# Altium PCB SolarChargerV2.PcbDoc
Units mm, origin at the board's own origin, x right, y up, seen from the top; angles counter-clockwise.
Board outline 61 x 50 mm, 2 copper layers (Top Layer, Bottom Layer); 114 components, 46 nets, 315 pads, 1851 vias.
Unrouted connection lines stored in the file: 111.
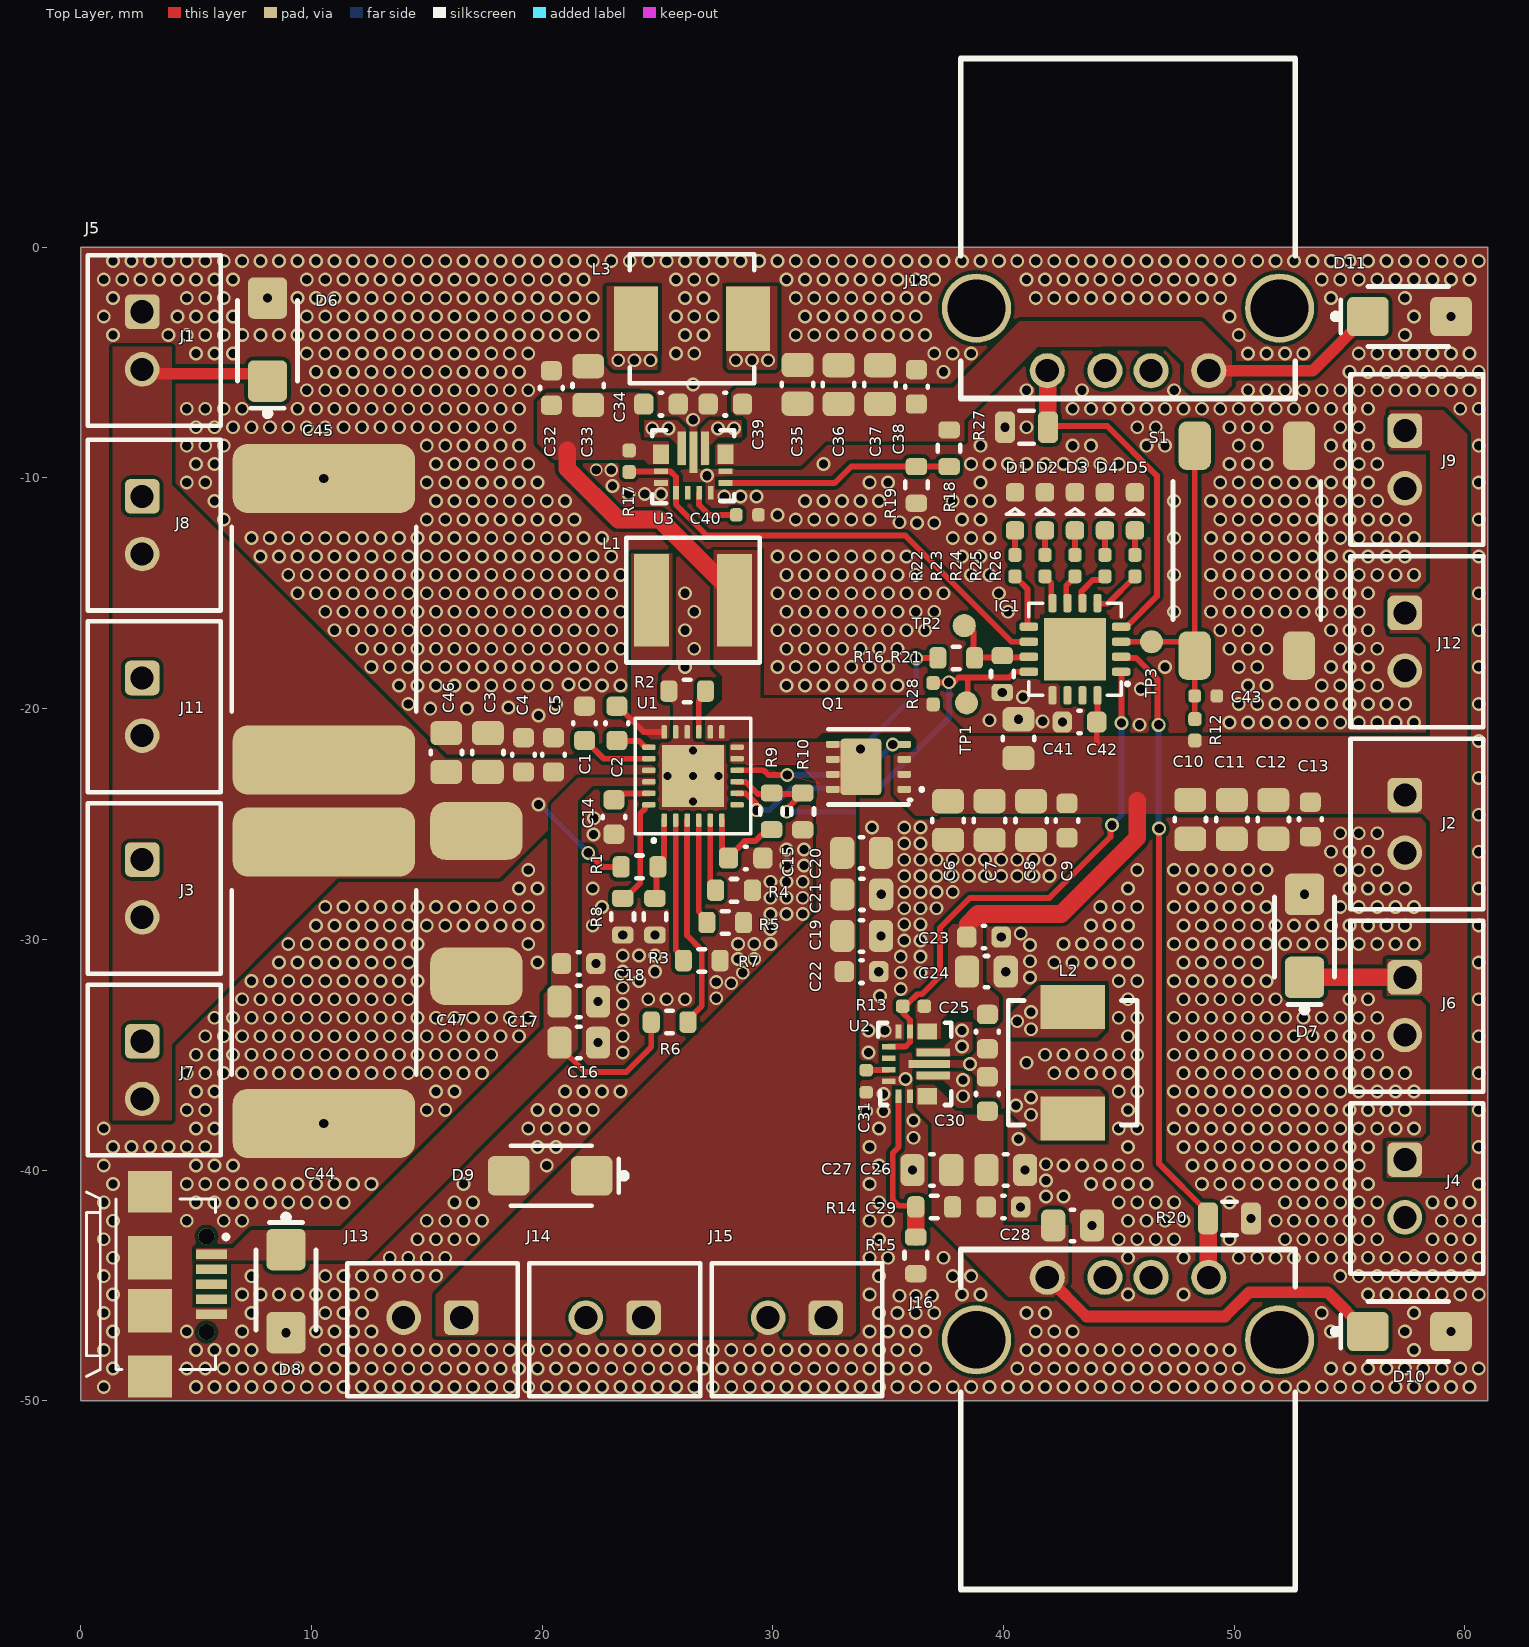
[diagram p0: Top Layer view]
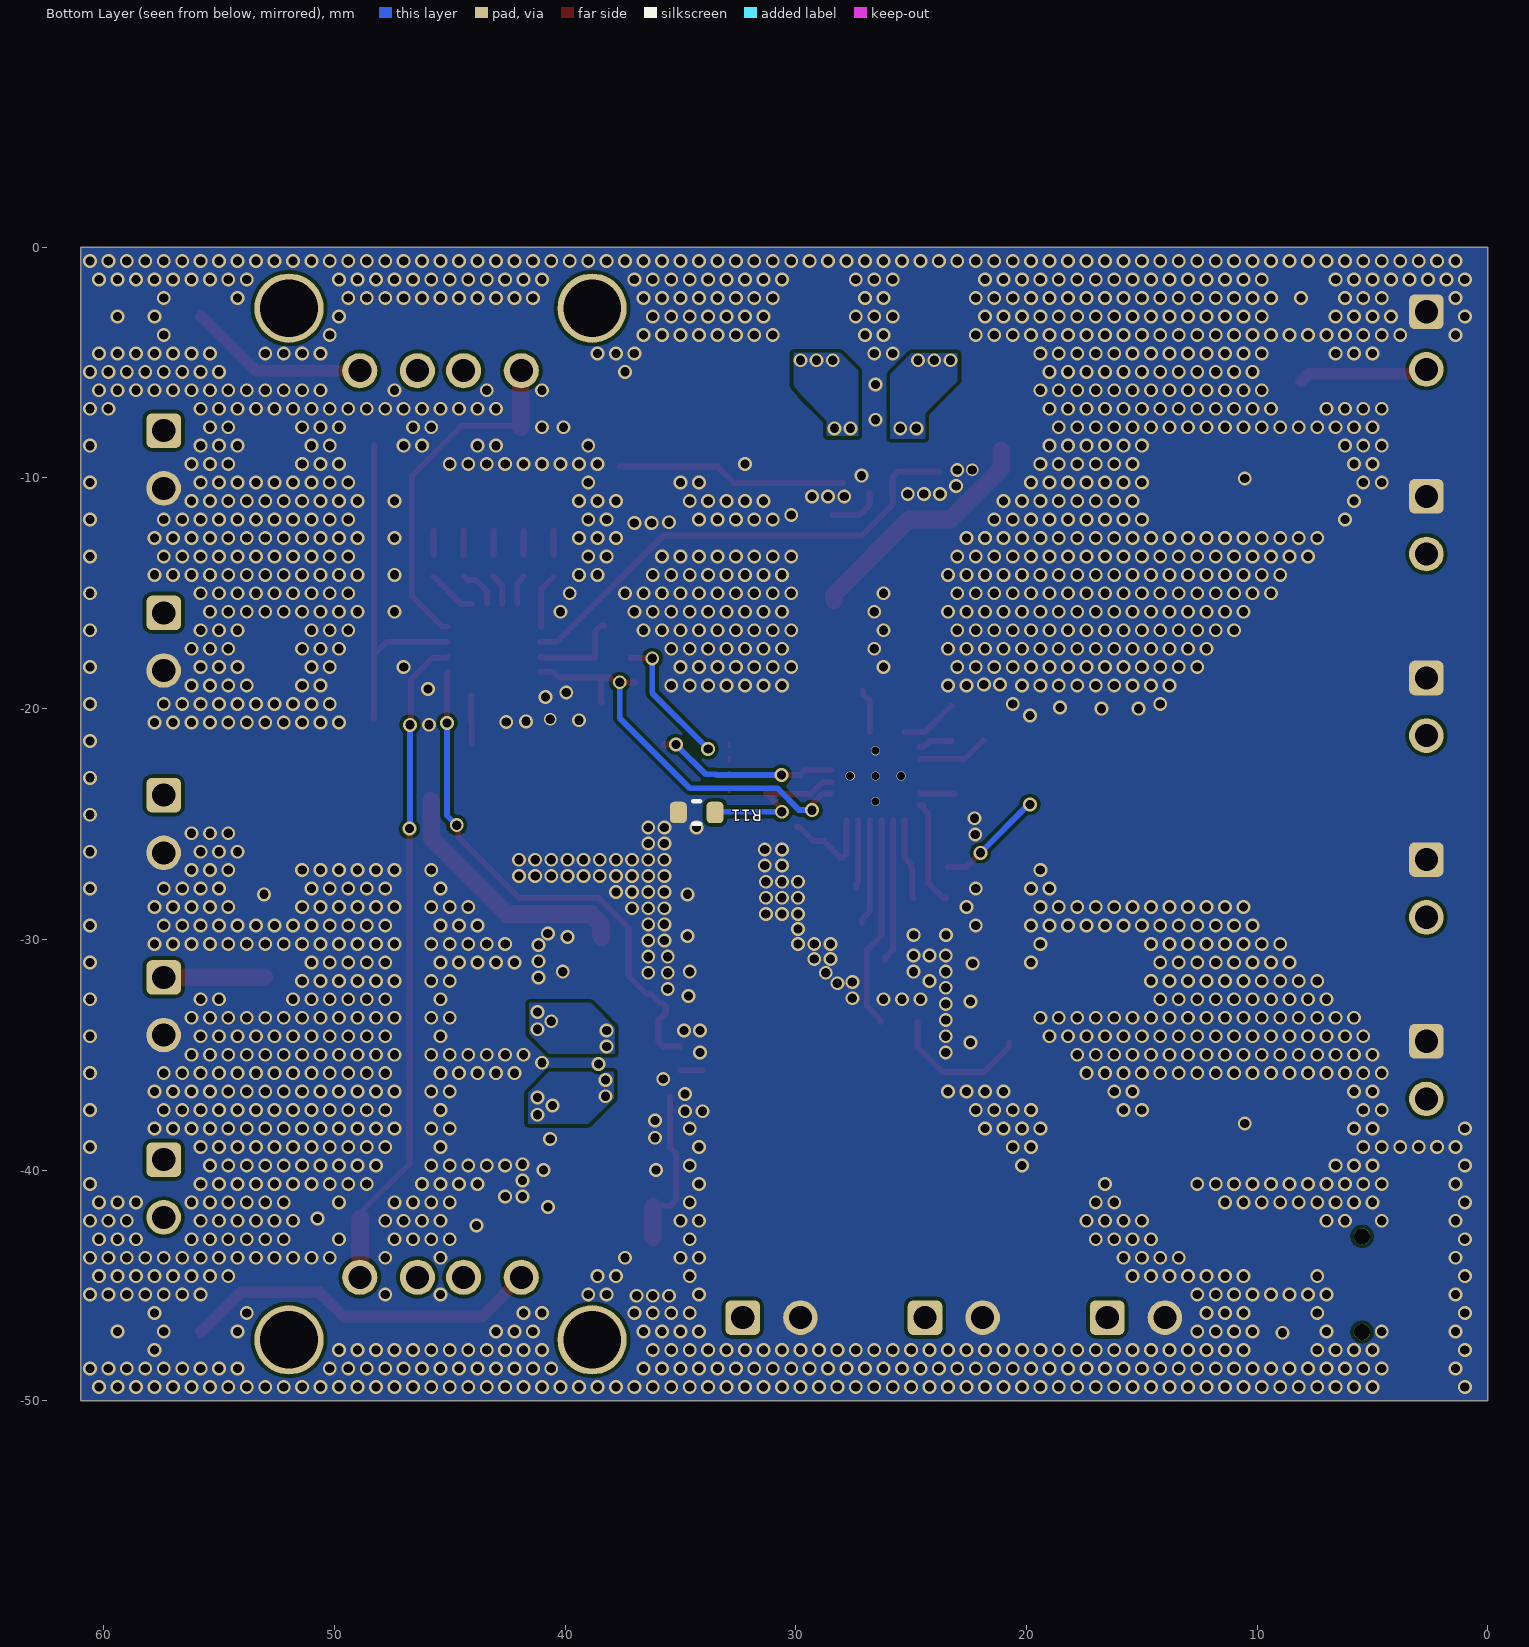
[diagram p1: Bottom Layer view, seen from below]
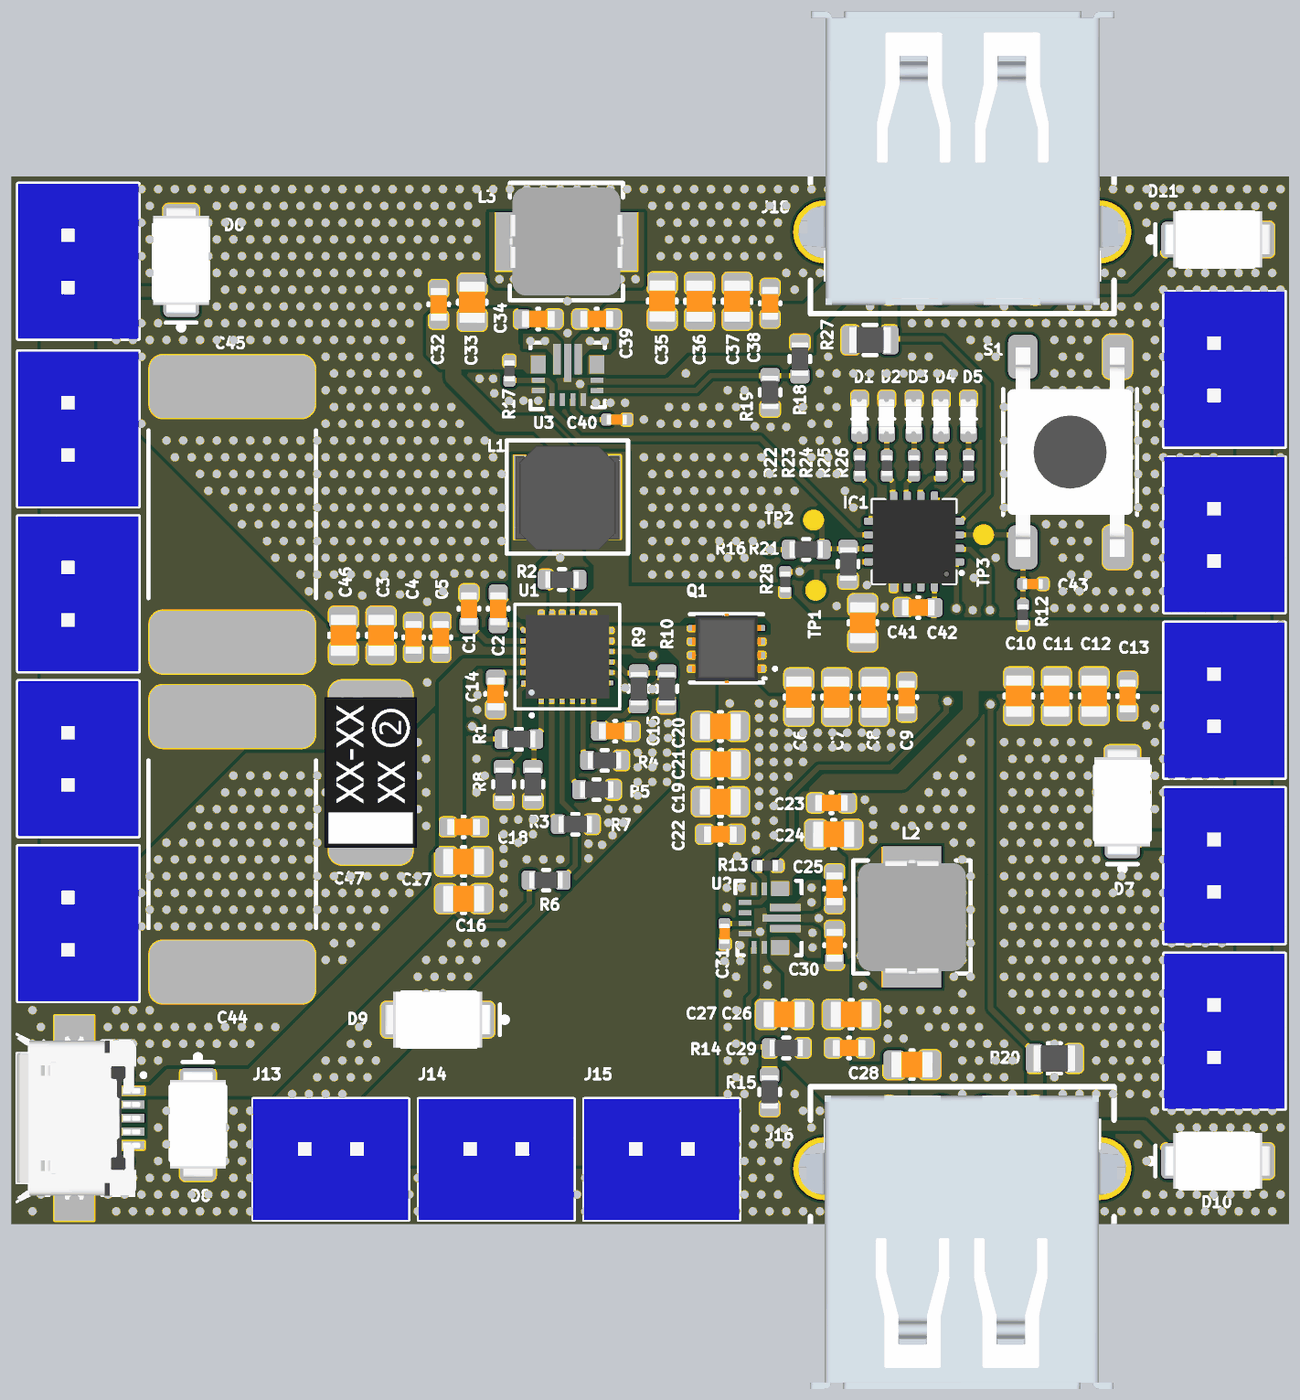
[diagram p2: 3D render of the assembled board from above, using the file's embedded part models]

## Layer stack, top to bottom
Top Solder: solder mask 0.0102, Solder Resist, Dk 3.5
Top Layer: signal copper 0.0356
Dielectric 1: dielectric 0.32, FR-4, Dk 4.8
Bottom Layer: signal copper 0.0356
Bottom Solder: solder mask 0.0102, Solder Resist, Dk 3.5

## Board outline
0,-50 0,0 61,0 61,-50

## Design rules (kind name [scope] priority, off if disabled: settings)
Clearance [All] p1: gap=0.15 ignorepadtopadclearanceinfootprint=FALSE except(0: Arc-Hole Track-Hole SMDPad-Hole THPad-Hole Via-Hole Fill-Hole Poly-Hole Region-Hole Text-Hole; 0.102: Arc-Arc Arc-Track Arc-SMDPad Track-Track Track-SMDPad SMDPad-SMDPad)
HoleSize [All] p1: absolutevalues=TRUE maxlimit=2.54 minlimit=0.3 maxpercent=80.000 minpercent=20.000
HoleToHoleClearance [All] p1: gap=0.127 allowstackedmicrovias=TRUE
MinimumSolderMaskSliver [All] p1: minsoldermaskwidth=0.127
PlaneConnect [All] p1: planeconnectstyle=Direct reliefexpansion=0.508 reliefentries=4 reliefconductorwidth=0.254 reliefairgap=0.254
PolygonConnect [All] p1: connectstyle=Direct reliefconductorwidth=0.254 reliefentries=4 polygonreliefangle="90 Angle" airgapwidth=0.254
RoutingVias [All] p1: holewidth=0.4 width=0.6 viastyle="Through Hole" minholewidth=0.3 minwidth=0.55 maxholewidth=1 maxwidth=0.1
SilkToSilkClearance [All] p1: silktosilkclearance=0.152
SilkToSolderMaskClearance [IsPad] p1: minsilkscreentomaskgap=0.152 clearancetoexposedcopper=TRUE
SolderMaskExpansion [All] p1: expansion=0.06 istentingtop=FALSE
Width [All] p1: maxlimit=0.762 minlimit=0.254 preferedwidth=0.254 minimp=50.000000 maximp=50.000000 favimp=50.000000
24 further rules are at their usual default settings.

## Components (designator, comment, footprint, x,y, rotation, side; value= is the part's Value field where it differs from the comment)
C1 "4.7u" C0603_N 21.844,-20.634 r270 top
C2 "10n" C0603_N 23.241,-20.634 r90 top
C3 "10u" C0805_N 17.65,-21.9 r90 top
C4 "100n" C0603_N 19.2,-22 r90 top
C5 "100n" C0603_N 20.5,-22 r90 top
C6 "10u" C0805_N 37.6,-24.85 r270 top
C7 "10u" C0805_N 39.4,-24.85 r270 top
C8 "10u" C0805_N 41.2,-24.85 r270 top
C9 "100n" C0603_N 42.75,-24.85 r270 top
C10 "10u" C0805_N 48.1,-24.8 r270 top
C11 "10u" C0805_N 49.9,-24.8 r270 top
C12 "10u" C0805_N 51.7,-24.8 r270 top
C13 "100n" C0603_N 53.3,-24.8 r270 top
C14 "4.7u" C0603_N 23.114,-24.698 r90 top
C15 "4.7u" C0603_N 28.829,-26.476 r0 top
C16 "10u" C0805_N 21.59,-34.477 r0 top
C17 "10u" C0805_N 21.59,-32.699 r0 top
C18 "100n" C0603_N 21.59,-31.048 r0 top
C19 "10u" C0805_N 33.85,-29.85 r0 top
C20 "10u" C0805_N 33.85,-26.25 r0 top
C21 "10u" C0805_N 33.86,-28.05 r0 top
C22 "100n" C0603_N 33.85,-31.4 r0 top
C23 "10u" C0603_N 39.155,-29.9 r0 top
C24 "10u" C0805_N 39.26,-31.4 r0 top
C25 "100n" C0603_N 39.3,-34 r270 top
C26 "22u" C0805_N 40.1,-40 r0 top
C27 "22u" C0805_N 36.9,-40 r180 top
C28 "22u" C0805_N 43,-42.4 r0 top
C29 "1u" C0603_N 40,-41.6 r0 top
C30 "100n" C0603_N 39.3,-36.7 r90 top
C31 "100n" C0402_N 34.05,-36.15 r270 top
C32 "10u" C0603_N 20.4,-6.1 r90 top
C33 "10u" C0805_N 22,-6 r90 top
C34 "100n" C0603_N 25.155,-6.8 r0 top
C35 "22u" C0805_N 31.075,-5.94 r90 top
C36 "22u" C0805_N 32.85,-5.95 r90 top
C37 "22u" C0805_N 34.65,-5.95 r90 top
C38 "1u" C0603_N 36.225,-6.05 r90 top
C39 "100n" C0603_N 27.945,-6.8 r180 top
C40 "100n" C0402_N 28.9,-11.6 r0 top
C41 "10u" C0805_N 40.65,-21.3 r90 top
C42 "100n" C0603_N 43.3,-20.575 r180 top
C43 "CAP" C0402_N 48.77,-19.45 r0 top
C44 "2,2m" C592D_X 10.541,-31.877 r90 top
C45 "2,2m" C592D_X 10.541,-16.125 r270 top
C46 "10u" C0805_N 15.85,-21.9 r90 top
C47 "100u" C_TR3D 17.15,-28.45 r90 top
D1 "LED" LED_0603 40.5,-11.45 r90 top
D2 "LED" LED_0603 41.8,-11.45 r90 top
D3 "LED" LED_0603 43.1,-11.45 r90 top
D4 "LED" LED_0603 44.4,-11.45 r90 top
D5 "LED" LED_0603 45.7,-11.45 r90 top
D6 "SMAJ15A" DO-214AC 8.1,-4 r90 top
D7 "SMAJ15A" DO-214AC 53.05,-29.85 r90 top
D8 "SMAJ15A" DO-214AC 8.9,-45.25 r270 top
D9 "SMAJ15A" DO-214AC 20.35,-40.25 r180 top
D10 "SMAJ15A" DO-214AC 57.6,-47 r0 top
D11 "SMAJ15A" DO-214AC 57.6,-3 r0 top
IC1 "PIC16F18425" UQFN-16 43.1,-17.425 r180 top
J1 "" B2B-XH-A 2.667,-10.795 r270 top
J2 "" B2B-XH-A 57.4,-23.75 r270 top locked
J3 "" B2B-XH-A 2.667,-34.417 r270 top
J4 "" B2B-XH-A 57.4,-39.55 r270 top locked
J5 "" B2B-XH-A 2.667,-2.794 r270 top
J6 "" B2B-XH-A 57.4,-31.65 r270 top locked
J7 "USB_OTG" WR-COM-629105136821 3,-46.1 r270 top
J8 "" B2B-XH-A 2.667,-18.669 r270 top
J9 "" B2B-XH-A 57.4,-7.95 r270 top locked
J11 "" B2B-XH-A 2.667,-26.543 r270 top
J12 "" B2B-XH-A 57.4,-15.85 r270 top locked
J13 "" B2B-XH-A 16.5,-46.4 r180 top
J14 "" B2B-XH-A 24.4,-46.4 r180 top
J15 "" B2B-XH-A 32.3,-46.4 r180 top
J16 "USB" USB_TYPE_A_SOCK 45.4,-44.65 r0 top locked
J18 "USB" USB_TYPE_A_SOCK 45.4,-5.35 r180 top locked
L1 "2u2" SNR5040 26.543,-15.3 r0 top
L2 "1.5u" IHLP2020 43,-35.35 r270 top
L3 "1.5u" IHLP2020 26.5,-3.1 r0 top
Q1 "CSD25402" DNH8 34.15,-22.525 r90 top
R1 "RES" R0603_N 24.224,-26.857 r0 top
R2 "RES" R0603_N 26.289,-19.237 r0 top
R3 "RES" R0603_N 24.892,-29.016 r270 top
R4 "RES" R0603_N 28.321,-27.873 r0 top
R5 "10k" R0603_N 27.94,-29.27 r0 top
R6 "10k" R0603_N 25.527,-33.588 r180 top
R7 "10k" R0603_N 26.924,-30.921 r0 top
R8 "10k" R0603_N 23.495,-29.016 r270 top
R9 "RES" R0603_N 29.95,-24.45 r90 top
R10 "RES" R0603_N 31.3,-24.455 r270 top
R11 "NTC" R0603_N 34.3,-24.5 r0 bottom
R12 "100k" R0402_N 48.3,-20.915 r90 top
R13 "10k" R0402_N 36.1,-32.9 r180 top
R14 "RES" R0603_N 36.995,-41.6 r180 top
R15 "RES" R0603_N 36.2,-43.7 r270 top
R16 "RES" R0603_N 37.95,-17.8 r0 top
R17 "10k" R0402_N 23.775,-9.275 r270 top
R18 "RES" R0603_N 37.645,-8.712 r270 top
R19 "RES" R0603_N 36.225,-10.3 r270 top
R20 "0.1R" R0805_N 49.8,-42.1 r180 top
R21 "RES" R0603_N 39.95,-18.5 r270 top
R22 "RES" R0402_N 40.5,-13.8 r90 top
R23 "RES" R0402_N 41.8,-13.8 r90 top
R24 "RES" R0402_N 43.1,-13.8 r90 top
R25 "RES" R0402_N 44.4,-13.8 r90 top
R26 "RES" R0402_N 45.7,-13.8 r90 top
R27 "0.1R" R0805_N 41,-7.8 r0 top
R28 "RES" R0402_N 36.95,-19.35 r90 top
S1 "PUSHBUTTON" TACT6X6_SMD 50.55,-13.15 r0 top
TP1 "TP" TP_1MM 38.4,-19.75 r90 top
TP2 "TP" TP_1MM 38.3,-16.4 r90 top
TP3 "TP" TP_1MM 46.417,-17.1 r90 top
U1 "BQ24166" VQFN-24 26.543,-22.92 r90 top
U2 "=Value" TPS63070 34.668,-33.619 r0 top
U3 "=Value" TPS63070 24.775,-11 r90 top

## Footprints (in the part's own frame and the unit in brackets; to place one, negate y for a bottom-side part, rotate by r counter-clockwise, add the part's x,y. Pads: shape width x height; smd on the part's side, far side on the other; paste and mask are expansions set on the pad)
B2B-XH-A [mm] "Header, Vertical, 2.50 mm pitch; 0.70 mm lead width, 5 pins, 1 row, 5 pins per row, 14.90 mm L X 5.75 mm W X 7.00 mm H body"
  rrect33% 1.5x1.5 / inner round 1.5 / far side rrect33% 1.5x1.5 hole 1 paste-1.5: 1(0,0)
  round 1.5 hole 1 paste-1.5: 2(2.5,0)
  silkscreen extent -2.45,-2.35 4.95,3.4, body extent -2.45,-2.35 4.95,3.4, height 7.05
C0402_N [mm] "Capacitor, Chip; 1.00 mm L X 0.50 mm W X 0.55 mm H body"
  rrect52% 0.54x0.58 smd: 1(-0.48,0) 2(0.48,0)
  body extent -0.5,-0.25 0.5,0.25, height 0.55
C592D_X [mm] "Tantalum Capacitor"
  rrect43% 3x7.9 smd: N(-6.1,0) P(6.1,0)
  silkscreen extent -4,-4 4,4
C0603_N [mm] "Capacitor, Chip; 1.60 mm L X 0.80 mm W X 0.87 mm H body"
  rrect50% 0.84x0.91 smd: 1(-0.745,0) 2(0.745,0)
  silkscreen extent -0.05,-0.49 0.05,0.49, body extent -0.8,-0.4 0.8,0.4, height 0.87
C0805_N [mm] "Capacitor, Chip; 2.00 mm L X 1.25 mm W X 1.35 mm H body"
  rrect48% 1.05x1.38 smd: 1(-0.84,0) 2(0.84,0)
  silkscreen extent -0.08,-0.68 0.08,0.68, body extent -1,-0.63 1,0.63, height 1.35
C_TR3D [mm] "Capacitor, 7.3 mm L X 4.3 mm W X 2.8 mm H body"
  rrect52% 2.5x4 smd: N(-3.15,0) P(3.15,0)
  body extent -3.59,-2.21 3.6,2.21, height 2.33
DNH8 [mm] "Small Outline No-Lead (SON with Tab), 0.65 mm pitch; 8 pin, 3.15 mm L X 3.30 mm W X 0.90 mm H body"
  rrect50% 0.3x0.6 smd: D(-0.975,-1.55) D(-0.325,-1.55) D(0.325,-1.55) G(0.975,-1.55) S(-0.975,1.55) S(-0.325,1.55) S(0.325,1.55) S(0.975,1.55)
  rrect18% 2.45x1.775 smd paste-2.45: S(0,0.33)
  Top Layer region: 0.825,1.2 1.125,1.2 1.125,1.325 0.825,1.325
  Top Layer region: 0.175,1.2 0.475,1.2 0.475,1.325 0.175,1.325
  Top Layer region: -0.475,1.2 -0.175,1.2 -0.175,1.325 -0.475,1.325
  Top Layer region: -1.125,1.2 -0.825,1.2 -0.825,1.325 -1.125,1.325
  silkscreen extent -1.63,-2.39 1.63,1.75, body extent -1.66,-1.65 1.65,1.65, height 0.9
DO-214AC [mm] "SMA"
  rrect30% 1.8x1.7 smd: A(1.8,0) C(-1.8,0)
  silkscreen extent -3.32,-1.3 1.7,1.3, body extent -2.55,-1.33 2.55,1.34, height 2.17
IHLP2020 [mm] "Inductor, 5.18mm L X 5.18mm W X 3 mm H body"
  rect 1.905x2.79 smd: 1(-2.425,0) 2(2.425,0)
  silkscreen extent -2.7,-2.8 2.7,2.8, body extent -2.73,-2.57 2.73,2.57, height 2.84
LED_0603 [mm] "LED, 0603"
  rrect50% 0.8x0.8 smd: A(-0.825,0) K(0.825,0)
  silkscreen extent -0.13,-0.38 0.13,0.38, body extent -0.83,-0.34 0.82,0.38, height 0.68
R0402_N [mm] "Resistor, Chip; 1.00 mm L X 0.50 mm W X 0.40 mm H body"
  rrect52% 0.6x0.58 smd: 1(-0.465,0) 2(0.465,0)
  body extent -0.5,-0.25 0.5,0.25, height 0.4
R0603_N [mm] "Resistor, Chip; 1.60 mm L X 0.80 mm W X 0.55 mm H body"
  rrect51% 0.74x0.93 smd: 1(-0.795,0) 2(0.795,0)
  silkscreen extent -0.15,-0.49 0.15,0.49, body extent -0.8,-0.4 0.8,0.4, height 0.55
R0805_N [mm] "Resistor, Chip; 2.00 mm L X 1.25 mm W X 0.60 mm H body"
  rrect51% 0.87x1.38 smd: 1(-0.93,0) 2(0.93,0)
  silkscreen extent -0.32,-0.72 0.32,0.72, body extent -1,-0.63 1,0.63, height 0.6
SNR5040 [mm] "2-Leads, Body 5.00x5.00mm"
  rect 1.5x4 smd: 1(-1.8,0) 2(1.8,0)
  silkscreen extent -2.9,-2.7 2.9,2.7, body extent -2.5,-2.54 2.5,2.46, height 4
TACT6X6_SMD [mm] "SMD Tact switch 4 pol"
  rrect50% 1.4x2.1 smd: 1(-2.26,-4.55) 1(-2.26,4.55) 2(2.26,-4.55) 2(2.26,4.55)
  silkscreen extent -3.2,-3 3.2,3, body extent -3,-5 3,5, height 4.98
TP_1MM [mm]
  round 1 smd paste-100 mask+0: 1(0,0)
TPS63070 [mm]
  rect 0.6x0.24 smd mask+0.011: 1(0.357,-1.031) 2(0.357,-1.531) 3(0.357,-2.031) 4(0.357,-2.531)
  rect 0.24x0.6 smd mask+0.011: 5(0.782,-3.181) 6(1.282,-3.181) 14(1.282,-0.381) 15(0.782,-0.381)
  rect 0.85x0.7 smd mask+0.011: 7(2.032,-3.181) 8(2.032,-3.181) 12(2.032,-0.381) 13(2.032,-0.381)
  rect 1.45x0.35 smd mask+0.011: 9(2.282,-2.281) 11(2.282,-1.281)
  rect 1.8x0.35 smd mask+0.011: 10(2.107,-1.781)
  silkscreen extent -0.1,-3.56 3.06,0
UQFN-16 [mm] "UQFN, 16 pin, 4 mm L X 4 mm W X 0.5 mm H body"
  rrect50% 0.8x0.35 smd mask+0.07: 1(-2,0.975) 2(-2,0.325) 3(-2,-0.325) 4(-2,-0.975) 9(2,-0.975) 10(2,-0.325) 11(2,0.325) 12(2,0.975)
  rrect50% 0.35x0.8 smd mask+0.07: 5(-0.975,-2) 6(-0.325,-2) 7(0.325,-2) 8(0.975,-2) 13(0.975,2) 14(0.325,2) 15(-0.325,2) 16(-0.975,2)
  rect 2.7x2.7 smd mask+0.07: TH(0,0)
  silkscreen extent -2.35,-2 2,2, body extent -2,-2 6.2,2, height 0.92
USB_TYPE_A_SOCK [mm] "Usb type A socket, THT"
  round 1.524 hole 1: D_N(-1,0) D_P(1,0) GND(3.5,0) VBUS(-3.5,0)
  round 3 hole 2.5: S(-6.57,-2.71) S(6.57,-2.71)
  silkscreen extent -7.25,-13.52 7.25,1.2, body extent -8.02,-13.22 7.97,0.78, height 7.63
VQFN-24 [mm] "VQFN 24 pin, 4 mm L X 4 mm W X 1 mm H body"
  rrect50% 0.58x0.24 smd: 1(-1.913,1.25) 2(-1.913,0.75) 3(-1.913,0.25) 4(-1.913,-0.25) 5(-1.913,-0.75) 6(-1.913,-1.25) 13(1.913,-1.25) 14(1.913,-0.75) 15(1.913,-0.25) 16(1.913,0.25) 17(1.913,0.75) 18(1.913,1.25)
  rrect50% 0.24x0.58 smd: 7(-1.25,-1.913) 8(-0.75,-1.913) 9(-0.25,-1.913) 10(0.25,-1.913) 11(0.75,-1.913) 12(1.25,-1.913) 19(1.25,1.913) 20(0.75,1.913) 21(0.25,1.913) 22(-0.25,1.913) 23(-0.75,1.913) 24(-1.25,1.913)
  rect 2.7x2.7 smd mask+0.07: TH(0,0)
  silkscreen extent -2.87,-2.5 2.5,2.5, body extent -2.05,-2.05 6.2,2.05, height 1
WR-COM-629105136821 [mm] "5 pins"
  rect 0.4x1.35 smd mask+0.07: D_N(-1.8,2.675) ID(-0.5,2.675)
  rect 0.4x1.35 smd: D_P(-1.15,2.675) GND(0.15,2.675) VBUS(-2.45,2.675)
  rect 1.8x1.9 smd: S(-5.15,0) S(2.85,0)
  rect 1.9x1.9 smd: S(-2.3,0) S(0,0)
  round 0.7 hole 0.7 unplated mask+0.07: ""(-3.225,2.45) ""(0.925,2.45)
  silkscreen extent -5.15,-2.75 2.85,3.36, body extent -5.15,-2.76 2.85,3.15, height 2.69

## Part data
C1 C2 C3 C4 C5 C6 C7 C8 C9 C10 C11 C12 C13 C14 C15 C16 C17 C18 C19 C20 C21 C22 C23 C24 C25 C26 C27 C28 C29 C30 C31 C32 C33 C34 C35 C36 C37 C38 C39 C40 C41 C42 C46: library part CAP, RevS="$Rev:: 58        $"
C44 C45 C47: library part CAP_POL, RevS="$Rev:: 58        $"
D6 D7 D8 D9 D10 D11: library part DIODE_ZENER
IC1: "PIC16F18425 chip with 16 pin lead"
J1 J2 J3 J4 J5 J6 J8 J9 J11 J12 J13 J14 J15: library part PINHDR_2X1, "Socket", ComponentLink1Description=Manufacturer, ComponentLink1URL=http://www.we-online.de, ComponentLink2Description=Datasheet, ComponentLink2URL=http://katalog.we-online.de/em/datasheet/691412320002.pdf
J7 J16 J18: "USB Connector, With Pegs, Micro USB Type B, USB 2.0, Receptacle, 5 Ways, Surface Mount, Right Angle"
L1 L2 L3: library part IND, "Inductor"
Q1: library part MOSFET_P
R5 R6 R7 R8 R11 R12 R13 R17 R20 R27: library part RES
U1: "2.5A, Dual-Input, Single Cell Switch Mode Li-Ion Battery Charger with Power Path / Management"
U2 U3: library part TPS63070, "2-V to 16-V Buck-Boost Converter With 3.6-A Switch Current"
C43: RevS="$Rev:: 58        $"

## Via types
v1: diameter 0.6, hole 0.4, Top Layer to Bottom Layer, tented both sides, 1844 vias
v2: diameter 0.4, hole 0.35, Top Layer to Bottom Layer, tented both sides, 5 vias
v3: diameter 0.55, hole 0.4, Top Layer to Bottom Layer, tented both sides, 2 vias

## Nets (pads, with @x,y where several pads share a name; then routed paths per layer and width w, separated by ;. In a path a pad name is that pad's centre, name@x,y a point inside that pad or via, vN(x,y) a via of type N, cw(c..) or ccw(c..) an arc to the next point about the centre after c; other vN are vias at no path point)
5V_1: C35.1 C36.1 C37.1 C38.1 C39.1 D11.C J18.VBUS R18.1 U3.7 U3.8 | length 7.9
  Top Layer w0.508: J18.VBUS 53.4,-5.35 55.75,-3 D11.C
5V_2: C26.1 C27.1 C28.1 C29.1 C30.1 D10.C J16.VBUS R14.1 U2.7 U2.8 | length 15.7
  Top Layer w0.508: J16.VBUS 43.6,-46.35 49.6,-46.35 50.65,-45.3 54.05,-45.3 55.75,-47 D10.C
BAT_SENS: IC1.11 R16.2 R21.1 TP2.1 | length 4
  Top Layer w0.254: TP2.1 38.447,-16.4 38.697,-16.65 38.697,-17.752 R16.2 38.77,-17.775 39.95,-17.775 41.075,-17.775 IC1.11
BUTTON: C43.1 IC1.3 R12.2 S1.1 TP3.1 | length 15.3
  Top Layer w0.254: IC1.3 TP3.1 47.734,-17.1 S1.1@48.29,-17.656 ; S1.1@48.29,-8.6 S1.1@48.29,-17.656 ; R12.2 48.295,-20.445 48.295,-19.4 48.295,-17.705 48.29,-17.7 S1.1@48.29,-17.656
CHG: IC1.12 R28.2 TP1.1 U1.8 | length 18
  Top Layer w0.254: U1.8 28.463,-23.677 28.827,-23.677 29.3,-24.15 v1(29.3,-24.4) ; R28.2 36.964,-18.871 37.548,-18.871 v1@37.556,-18.879 ; v1@37.821,-18.879 38.05,-18.65 38.45,-18.65 ; TP1.1 38.45,-19.7 38.45,-18.65 ; IC1.12 40.5,-18.4 40.25,-18.65 38.45,-18.65
  Bottom Layer w0.254: v1(29.3,-24.4) 29.85,-24.4 30.798,-23.452 34.598,-23.452 37.633,-20.417 v1(37.633,-18.858)
DRV: C15.1 R9.1 U1.6 | length 4.2
  Top Layer w0.254: U1.6 27.8,-24.84 27.8,-26.302 C15.1@27.974,-26.476 ; C15.1 28.084,-26.441 28.781,-25.744 29.237,-25.744 29.855,-25.126 R9.1@29.95,-25.126
EN1: IC1.1 R13.2 U2.1 U2.14 | length 23.3
  Top Layer w0.254: U2.1 35.75,-34.65 35.95,-34.45 U2.14 35.95,-33.5 35.635,-33.185 R13.2 35.783,-32.752 35.888,-32.752 36.259,-32.381 36.469,-32.381 37.25,-31.6 37.25,-29.5 38.55,-28.2 42,-28.2 44.634,-25.566 44.634,-25.116 v1(44.7,-25.05) ; IC1.1 45.094,-18.406 45.121,-18.433 v1(45.121,-20.62)
  Bottom Layer w0.254: v1(44.7,-25.05) 45.121,-24.629 v1(45.121,-20.62)
EN2: IC1.10 R17.2 U3.1 U3.14 | length 21.1
  Top Layer w0.254: R17.2 23.79,-9.725 25.149,-9.725 U3.14 25.163,-9.725 25.575,-9.725 25.806,-9.956 U3.1 25.8,-10.649 25.8,-11.15 27.15,-12.5 35.75,-12.5 40.35,-17.1 IC1.10
GND: C1.1 C3.2 C4.2 C5.2 C6.2 C7.2 C8.2 C9.2 C10.2 C11.2 C12.2 C13.2 C14.1 C15.2 C16.2 C17.2 C18.2 C19.2 C20.2 C21.2 C22.2 C23.2 C24.2 C25.2 C26.2 C27.2 C28.2 C29.2 C30.2 C31.2 C32.2 C33.2 C34.2 C35.2 C36.2 C37.2 C38.2 C39.2 C40.2 C41.2 C42.2 C43.2 C44.N C45.N C46.2 C47.N D1.K D2.K D3.K D4.K D5.K D6.A D7.A D8.A D9.A D10.A D11.A IC1.13 J1.1 J2.2 J3.1 J5.1 J6.2 J7.GND J7.S J8.1 J9.2 J11.1 J12.2 J13.2 J14.2 J15.2 R2.1 R3.2 R4.2 R5.2 R7.2 R8.2 R10.2 R11.2 R15.2 R19.2 R20.1 R21.2 R27.1 S1.2 U1.16 U1.17 U1.TH U2.4 U2.6 U2.10 U2.15 U3.4 U3.6 U3.10 U3.15
  other v1: 1,-49.4 5,-49.4 5.8,-49.4 6.6,-49.4 7.4,-49.4 8.2,-49.4 9,-49.4 9.8,-49.4 10.6,-49.4 11.4,-49.4 12.2,-49.4 13,-49.4 13.8,-49.4 14.6,-49.4 15.4,-49.4 16.2,-49.4 17,-49.4 17.8,-49.4 18.6,-49.4 19.4,-49.4 20.2,-49.4 21,-49.4 21.8,-49.4 22.6,-49.4 23.4,-49.4 24.2,-49.4 25,-49.4 25.8,-49.4 26.6,-49.4 27.4,-49.4 28.2,-49.4 29,-49.4 29.8,-49.4 30.6,-49.4 31.4,-49.4 32.2,-49.4 33,-49.4 33.8,-49.4 34.6,-49.4 35.4,-49.4 36.2,-49.4 37,-49.4 37.8,-49.4 38.6,-49.4 39.4,-49.4 40.2,-49.4 41,-49.4 41.8,-49.4 42.6,-49.4 43.4,-49.4 44.2,-49.4 45,-49.4 45.8,-49.4 46.6,-49.4 47.4,-49.4 48.2,-49.4 49,-49.4 49.8,-49.4 50.6,-49.4 51.4,-49.4 52.2,-49.4 53,-49.4 53.8,-49.4 54.6,-49.4 55.4,-49.4 56.2,-49.4 57,-49.4 57.8,-49.4 58.6,-49.4 59.4,-49.4 60.2,-49.4 1.4,-48.6 4.6,-48.6 5.4,-48.6 6.2,-48.6 7,-48.6 7.8,-48.6 8.6,-48.6 9.4,-48.6 10.2,-48.6 11,-48.6 11.8,-48.6 12.6,-48.6 13.4,-48.6 14.2,-48.6 15,-48.6 15.8,-48.6 16.6,-48.6 17.4,-48.6 18.2,-48.6 19,-48.6 19.8,-48.6 20.6,-48.6 21.4,-48.6 22.2,-48.6 23,-48.6 23.8,-48.6 24.6,-48.6 25.4,-48.6 26.2,-48.6 27,-48.6 27.8,-48.6 28.6,-48.6 29.4,-48.6 30.2,-48.6 31,-48.6 31.8,-48.6 32.6,-48.6 33.4,-48.6 34.2,-48.6 35,-48.6 35.8,-48.6 36.6,-48.6 40.6,-48.6 41.4,-48.6 42.2,-48.6 43,-48.6 43.8,-48.6 44.6,-48.6 45.4,-48.6 46.2,-48.6 47,-48.6 47.8,-48.6 48.6,-48.6 49.4,-48.6 50.2,-48.6 54.2,-48.6 55,-48.6 55.8,-48.6 56.6,-48.6 57.4,-48.6 58.2,-48.6 59,-48.6 59.8,-48.6 60.6,-48.6 1,-47.8 5,-47.8 5.8,-47.8 6.6,-47.8 7.4,-47.8 10.6,-47.8 11.4,-47.8 12.2,-47.8 13,-47.8 13.8,-47.8 14.6,-47.8 15.4,-47.8 16.2,-47.8 17,-47.8 17.8,-47.8 18.6,-47.8 19.4,-47.8 20.2,-47.8 21,-47.8 21.8,-47.8 22.6,-47.8 23.4,-47.8 24.2,-47.8 25,-47.8 25.8,-47.8 26.6,-47.8 27.4,-47.8 28.2,-47.8 29,-47.8 29.8,-47.8 30.6,-47.8 31.4,-47.8 32.2,-47.8 33,-47.8 33.8,-47.8 34.6,-47.8 35.4,-47.8 36.2,-47.8 41,-47.8 41.8,-47.8 42.6,-47.8 43.4,-47.8 44.2,-47.8 45,-47.8 45.8,-47.8 46.6,-47.8 47.4,-47.8 48.2,-47.8 49,-47.8 49.8,-47.8 57.8,-47.8 8.9,-47.05 1.4,-47 4.6,-47 7,-47 10.2,-47 11,-47 11.8,-47 12.6,-47 34.2,-47 35,-47 35.8,-47 36.6,-47 41.4,-47 42.2,-47 43,-47 54.2,-47 57.4,-47 59.4,-47 1,-46.2 7.4,-46.2 10.6,-46.2 11.4,-46.2 12.2,-46.2 34.6,-46.2 35.4,-46.2 36.2,-46.2 37,-46.2 41,-46.2 41.8,-46.2 53.8,-46.2 57.8,-46.2 35.5,-45.45 36.2,-45.45 36.9,-45.45 1.4,-45.4 7,-45.4 7.8,-45.4 8.6,-45.4 9.4,-45.4 10.2,-45.4 11,-45.4 11.8,-45.4 12.6,-45.4 34.2,-45.4 38.2,-45.4 39,-45.4 45.4,-45.4 47.8,-45.4 55.8,-45.4 56.6,-45.4 57.4,-45.4 58.2,-45.4 59,-45.4 59.8,-45.4 60.6,-45.4 1,-44.6 7.4,-44.6 10.6,-44.6 11.4,-44.6 12.2,-44.6 13,-44.6 13.8,-44.6 14.6,-44.6 15.4,-44.6 34.6,-44.6 37.8,-44.6 38.6,-44.6 54.6,-44.6 55.4,-44.6 56.2,-44.6 57,-44.6 57.8,-44.6 58.6,-44.6 59.4,-44.6 60.2,-44.6 1.4,-43.8 13.4,-43.8 14.2,-43.8 15,-43.8 15.8,-43.8 34.2,-43.8 35,-43.8 37.4,-43.8 45.4,-43.8 47.8,-43.8 50.2,-43.8 51,-43.8 51.8,-43.8 52.6,-43.8 53.4,-43.8 54.2,-43.8 55,-43.8 55.8,-43.8 56.6,-43.8 57.4,-43.8 58.2,-43.8 59,-43.8 59.8,-43.8 60.6,-43.8 1,-43 14.6,-43 15.4,-43 16.2,-43 17,-43 34.6,-43 45,-43 45.8,-43 46.6,-43 47.4,-43 49.8,-43 52.2,-43 53,-43 53.8,-43 54.6,-43 55.4,-43 56.2,-43 58.6,-43 59.4,-43 60.2,-43 43.84,-42.4 1.4,-42.2 4.6,-42.2 6.2,-42.2 7,-42.2 15,-42.2 15.8,-42.2 16.6,-42.2 17.4,-42.2 34.2,-42.2 35,-42.2 45.4,-42.2 46.2,-42.2 47,-42.2 47.8,-42.2 51.8,-42.2 52.6,-42.2 53.4,-42.2 54.2,-42.2 55,-42.2 55.8,-42.2 59,-42.2 59.8,-42.2 60.6,-42.2 50.73,-42.1 40.745,-41.6 1,-41.4 5,-41.4 5.8,-41.4 6.6,-41.4 7.4,-41.4 8.2,-41.4 9,-41.4 9.8,-41.4 10.6,-41.4 11.4,-41.4 16.2,-41.4 17,-41.4 34.6,-41.4 45,-41.4 45.8,-41.4 46.6,-41.4 47.4,-41.4 49.8,-41.4 52.2,-41.4 53,-41.4 53.8,-41.4 54.6,-41.4 55.4,-41.4 56.2,-41.4 58.6,-41.4 59.4,-41.4 60.2,-41.4 41.85,-41.15 42.6,-41.15 1.4,-40.6 4.6,-40.6 5.4,-40.6 6.2,-40.6 7,-40.6 7.8,-40.6 8.6,-40.6 9.4,-40.6 10.2,-40.6 11,-40.6 11.8,-40.6 12.6,-40.6 16.6,-40.6 34.2,-40.6 43.8,-40.6 44.6,-40.6 45.4,-40.6 46.2,-40.6 48.6,-40.6 49.4,-40.6 50.2,-40.6 51,-40.6 51.8,-40.6 52.6,-40.6 53.4,-40.6 54.2,-40.6 55,-40.6 55.8,-40.6 60.6,-40.6 41.85,-40.45 36.06,-40 40.94,-40 1,-39.8 5,-39.8 5.8,-39.8 6.6,-39.8 20.2,-39.8 34.6,-39.8 42.6,-39.8 43.4,-39.8 44.2,-39.8 45,-39.8 45.8,-39.8 48.2,-39.8 49,-39.8 49.8,-39.8 50.6,-39.8 51.4,-39.8 52.2,-39.8 53,-39.8 53.8,-39.8 54.6,-39.8 55.4,-39.8 41.85,-39.75 1.4,-39 2.2,-39 3,-39 3.8,-39 4.6,-39 5.4,-39 19.8,-39 20.6,-39 34.2,-39 45.4,-39 47.8,-39 48.6,-39 49.4,-39 50.2,-39 51,-39 51.8,-39 52.6,-39 53.4,-39 54.2,-39 55,-39 55.8,-39 60.6,-39 40.65,-38.65 36.1,-38.6 1,-38.2 5,-38.2 5.8,-38.2 19.4,-38.2 20.2,-38.2 21,-38.2 21.8,-38.2 34.6,-38.2 45,-38.2 45.8,-38.2 47.4,-38.2 48.2,-38.2 49,-38.2 49.8,-38.2 50.6,-38.2 51.4,-38.2 52.2,-38.2 53,-38.2 53.8,-38.2 54.6,-38.2 55.4,-38.2 56.2,-38.2 57,-38.2 57.8,-38.2 10.541,-37.977 36.1,-37.85 34.05,-37.45 34.8,-37.45 4.6,-37.4 5.4,-37.4 15,-37.4 15.8,-37.4 19.8,-37.4 20.6,-37.4 21.4,-37.4 22.2,-37.4 45.4,-37.4 47.8,-37.4 48.6,-37.4 49.4,-37.4 50.2,-37.4 51,-37.4 51.8,-37.4 52.6,-37.4 53.4,-37.4 54.2,-37.4 55,-37.4 55.8,-37.4 56.6,-37.4 57.4,-37.4 60.6,-37.4 34.8,-36.7 5,-36.6 5.8,-36.6 15.4,-36.6 16.2,-36.6 21,-36.6 21.8,-36.6 22.6,-36.6 23.4,-36.6 45,-36.6 45.8,-36.6 47.4,-36.6 48.2,-36.6 49,-36.6 49.8,-36.6 50.6,-36.6 51.4,-36.6 52.2,-36.6 53,-36.6 53.8,-36.6 54.6,-36.6 55.4,-36.6 56.2,-36.6 57,-36.6 57.8,-36.6 35.75,-36.05 4.6,-35.8 5.4,-35.8 6.2,-35.8 7,-35.8 7.8,-35.8 8.6,-35.8 9.4,-35.8 10.2,-35.8 11,-35.8 11.8,-35.8 12.6,-35.8 13.4,-35.8 14.2,-35.8 15,-35.8 15.8,-35.8 16.6,-35.8 17.4,-35.8 42.2,-35.8 43,-35.8 43.8,-35.8 44.6,-35.8 45.4,-35.8 47.8,-35.8 48.6,-35.8 49.4,-35.8 50.2,-35.8 51,-35.8 51.8,-35.8 52.6,-35.8 53.4,-35.8 54.2,-35.8 55,-35.8 55.8,-35.8 56.6,-35.8 57.4,-35.8 60.6,-35.8 38.55,-35.4 41,-35.35 5,-35 5.8,-35 6.6,-35 7.4,-35 8.2,-35 9,-35 9.8,-35 10.6,-35 11.4,-35 12.2,-35 13,-35 13.8,-35 14.6,-35 15.4,-35 16.2,-35 17,-35 17.8,-35 41.8,-35 42.6,-35 43.4,-35 44.2,-35 45,-35 45.8,-35 47.4,-35 48.2,-35 49,-35 49.8,-35 50.6,-35 51.4,-35 52.2,-35 53,-35 53.8,-35 54.6,-35 55.4,-35 56.2,-35 23.5,-34.9 34.15,-34.9 22.43,-34.477 5.4,-34.2 6.2,-34.2 7,-34.2 7.8,-34.2 8.6,-34.2 9.4,-34.2 10.2,-34.2 11,-34.2 11.8,-34.2 12.6,-34.2 13.4,-34.2 14.2,-34.2 15,-34.2 15.8,-34.2 16.6,-34.2 17.4,-34.2 18.2,-34.2 19,-34.2 23.5,-34.2 45.4,-34.2 47.8,-34.2 48.6,-34.2 49.4,-34.2 50.2,-34.2 51,-34.2 51.8,-34.2 52.6,-34.2 53.4,-34.2 54.2,-34.2 55,-34.2 55.8,-34.2 60.6,-34.2 34.15,-33.95 34.85,-33.95 23.5,-33.5 5.8,-33.4 6.6,-33.4 7.4,-33.4 8.2,-33.4 9,-33.4 9.8,-33.4 10.6,-33.4 11.4,-33.4 12.2,-33.4 13,-33.4 13.8,-33.4 14.6,-33.4 15.4,-33.4 16.2,-33.4 17,-33.4 17.8,-33.4 18.6,-33.4 19.4,-33.4 45,-33.4 45.8,-33.4 47.4,-33.4 48.2,-33.4 49,-33.4 49.8,-33.4 50.6,-33.4 51.4,-33.4 52.2,-33.4 53,-33.4 53.8,-33.4 54.6,-33.4 55.4,-33.4 56.2,-33.4 23.5,-32.8 22.43,-32.699 7,-32.6 7.8,-32.6 8.6,-32.6 9.4,-32.6 10.2,-32.6 11,-32.6 11.8,-32.6 12.6,-32.6 13.4,-32.6 14.2,-32.6 24.6,-32.6 25.4,-32.6 26.2,-32.6 45.4,-32.6 47.8,-32.6 48.6,-32.6 49.4,-32.6 50.2,-32.6 51,-32.6 51.8,-32.6 55,-32.6 55.8,-32.6 60.6,-32.6 27.55,-32.55 34.65,-32.45 35.55,-32.15 23.5,-32.1 28.2,-31.9 27.55,-31.85 7.4,-31.8 8.2,-31.8 9,-31.8 9.8,-31.8 10.6,-31.8 11.4,-31.8 12.2,-31.8 13,-31.8 13.8,-31.8 14.6,-31.8 24.2,-31.8 45,-31.8 45.8,-31.8 47.4,-31.8 48.2,-31.8 49,-31.8 49.8,-31.8 50.6,-31.8 51.4,-31.8 41.15,-31.65 28.7,-31.45 35.55,-31.45 36.4,-31.45 23.5,-31.4 24.9,-31.4 34.595,-31.4 40.1,-31.4 22.335,-31.048 8.6,-31 9.4,-31 10.2,-31 11,-31 11.8,-31 12.6,-31 13.4,-31 14.2,-31 19.8,-31 42.2,-31 43,-31 43.8,-31 44.6,-31 45.4,-31 47.8,-31 48.6,-31 49.4,-31 50.2,-31 51,-31 60.6,-31 41.15,-30.95 28.5,-30.85 29.2,-30.85 35.55,-30.75 36.4,-30.75 23.5,-30.7 24.2,-30.7 24.9,-30.7 41.15,-30.25 9,-30.2 9.8,-30.2 10.6,-30.2 11.4,-30.2 12.2,-30.2 13,-30.2 13.8,-30.2 14.6,-30.2 19.4,-30.2 28.5,-30.2 29.2,-30.2 29.9,-30.2 42.6,-30.2 43.4,-30.2 44.2,-30.2 45,-30.2 45.8,-30.2 47.4,-30.2 48.2,-30.2 49,-30.2 49.8,-30.2 50.6,-30.2 51.4,-30.2 52.2,-30.2 53,-30.2 53.8,-30.2 54.6,-30.2 55.4,-30.2 56.2,-30.2 57,-30.2 57.8,-30.2 35.7,-30.05 36.4,-30.05 39.9,-29.9 34.69,-29.85 23.495,-29.811 24.892,-29.811 40.75,-29.75 29.9,-29.55 10.2,-29.4 11,-29.4 11.8,-29.4 12.6,-29.4 13.4,-29.4 14.2,-29.4 15,-29.4 15.8,-29.4 16.6,-29.4 17.4,-29.4 18.2,-29.4 19,-29.4 19.8,-29.4 22.2,-29.4 43.8,-29.4 44.6,-29.4 45.4,-29.4 47.8,-29.4 48.6,-29.4 49.4,-29.4 50.2,-29.4 51,-29.4 51.8,-29.4 52.6,-29.4 53.4,-29.4 54.2,-29.4 55,-29.4 55.8,-29.4 56.6,-29.4 57.4,-29.4 60.6,-29.4 35.7,-29.35 36.4,-29.35 29.9,-28.9 30.6,-28.9 31.3,-28.9 35.7,-28.65 36.4,-28.65 37.1,-28.65 10.6,-28.6 11.4,-28.6 12.2,-28.6 13,-28.6 13.8,-28.6 14.6,-28.6 15.4,-28.6 16.2,-28.6 17,-28.6 17.8,-28.6 18.6,-28.6 19.4,-28.6 22.6,-28.6 44.2,-28.6 45,-28.6 45.8,-28.6 47.4,-28.6 48.2,-28.6 49,-28.6 49.8,-28.6 50.6,-28.6 51.4,-28.6 54.6,-28.6 55.4,-28.6 56.2,-28.6 57,-28.6 57.8,-28.6 29.9,-28.2 30.6,-28.2 31.3,-28.2 34.7,-28.05 53.05,-28.05 35.7,-27.95 36.4,-27.95 37.1,-27.95 37.8,-27.95 19,-27.8 19.8,-27.8 22.2,-27.8 45.4,-27.8 47.8,-27.8 48.6,-27.8 49.4,-27.8 50.2,-27.8 51,-27.8 55,-27.8 55.8,-27.8 56.6,-27.8 57.4,-27.8 60.6,-27.8 29.9,-27.5 30.6,-27.5 31.3,-27.5 35.7,-27.25 36.4,-27.25 37.1,-27.25 37.8,-27.25 38.5,-27.25 39.2,-27.25 39.9,-27.25 40.6,-27.25 41.3,-27.25 42,-27.25 19.4,-27 45.8,-27 47.4,-27 48.2,-27 49,-27 49.8,-27 50.6,-27 51.4,-27 54.6,-27 55.4,-27 56.2,-27 30.6,-26.8 31.35,-26.8 35.7,-26.55 36.4,-26.55 37.1,-26.55 37.8,-26.55 38.5,-26.55 39.2,-26.55 39.9,-26.55 40.6,-26.55 41.3,-26.55 42,-26.55 54.2,-26.2 55,-26.2 55.8,-26.2 60.6,-26.2 30.6,-26.1 31.35,-26.1 35.7,-25.85 36.4,-25.85 22.225,-25.46 54.6,-25.4 55.4,-25.4 56.2,-25.4 34.3,-25.15 35.7,-25.15 36.4,-25.15 22.25,-24.75 60.6,-24.6 60.6,-23 60.6,-21.4 45.9,-20.7 49.8,-20.6 50.6,-20.6 51.4,-20.6 52.2,-20.6 53,-20.6 53.8,-20.6 54.6,-20.6 55.4,-20.6 56.2,-20.6 57,-20.6 57.8,-20.6 42.555,-20.575 41.7,-20.55 39.4,-20.5 19.85,-20.3 15.15,-20 16.75,-20 18.55,-19.95 14.2,-19.8 20.6,-19.8 50.2,-19.8 51,-19.8 51.8,-19.8 52.6,-19.8 53.4,-19.8 54.2,-19.8 55,-19.8 55.8,-19.8 56.6,-19.8 57.4,-19.8 60.6,-19.8 40.85,-19.5 39.95,-19.295 45.95,-19.15 13.8,-19 14.6,-19 15.4,-19 16.2,-19 17,-19 17.8,-19 18.6,-19 19.4,-19 20.2,-19 22.6,-19 23.4,-19 30.6,-19 31.4,-19 32.2,-19 33,-19 33.8,-19 34.6,-19 35.4,-19 50.6,-19 51.4,-19 53.8,-19 54.6,-19 55.4,-19 56.2,-19 21.15,-18.95 21.85,-18.95 12.6,-18.2 13.4,-18.2 14.2,-18.2 15,-18.2 15.8,-18.2 16.6,-18.2 17.4,-18.2 18.2,-18.2 19,-18.2 19.8,-18.2 20.6,-18.2 21.4,-18.2 22.2,-18.2 23,-18.2 26.2,-18.2 30.2,-18.2 31,-18.2 31.8,-18.2 32.6,-18.2 33.4,-18.2 34.2,-18.2 35,-18.2 47,-18.2 50.2,-18.2 51,-18.2 54.2,-18.2 55,-18.2 55.8,-18.2 60.6,-18.2 12.2,-17.4 13,-17.4 13.8,-17.4 14.6,-17.4 15.4,-17.4 16.2,-17.4 17,-17.4 17.8,-17.4 18.6,-17.4 19.4,-17.4 20.2,-17.4 21,-17.4 21.8,-17.4 22.6,-17.4 23.4,-17.4 26.6,-17.4 30.6,-17.4 31.4,-17.4 32.2,-17.4 33,-17.4 33.8,-17.4 34.6,-17.4 35.4,-17.4 49.8,-17.4 50.6,-17.4 51.4,-17.4 54.6,-17.4 55.4,-17.4 56.2,-17.4 11,-16.6 11.8,-16.6 12.6,-16.6 13.4,-16.6 14.2,-16.6 15,-16.6 15.8,-16.6 16.6,-16.6 17.4,-16.6 18.2,-16.6 19,-16.6 19.8,-16.6 20.6,-16.6 21.4,-16.6 22.2,-16.6 23,-16.6 26.2,-16.6 30.2,-16.6 31,-16.6 31.8,-16.6 32.6,-16.6 33.4,-16.6 34.2,-16.6 35,-16.6 35.8,-16.6 36.6,-16.6 49.4,-16.6 50.2,-16.6 51,-16.6 54.2,-16.6 55,-16.6 55.8,-16.6 60.6,-16.6 10.6,-15.8 11.4,-15.8 12.2,-15.8 13,-15.8 13.8,-15.8 14.6,-15.8 15.4,-15.8 16.2,-15.8 17,-15.8 17.8,-15.8 18.6,-15.8 19.4,-15.8 20.2,-15.8 21,-15.8 21.8,-15.8 22.6,-15.8 23.4,-15.8 26.6,-15.8 30.6,-15.8 31.4,-15.8 32.2,-15.8 33,-15.8 33.8,-15.8 34.6,-15.8 35.4,-15.8 36.2,-15.8 37,-15.8 40.2,-15.8 47.4,-15.8 49,-15.8 49.8,-15.8 50.6,-15.8 51.4,-15.8 52.2,-15.8 53,-15.8 53.8,-15.8 54.6,-15.8 55.4,-15.8 9.4,-15 10.2,-15 11,-15 11.8,-15 12.6,-15 13.4,-15 14.2,-15 15,-15 15.8,-15 16.6,-15 17.4,-15 18.2,-15 19,-15 19.8,-15 20.6,-15 21.4,-15 22.2,-15 23,-15 26.2,-15 30.2,-15 31,-15 31.8,-15 32.6,-15 33.4,-15 34.2,-15 35,-15 35.8,-15 36.6,-15 37.4,-15 39.8,-15 49.4,-15 50.2,-15 51,-15 51.8,-15 52.6,-15 53.4,-15 54.2,-15 55,-15 55.8,-15 60.6,-15 9,-14.2 9.8,-14.2 10.6,-14.2 11.4,-14.2 12.2,-14.2 13,-14.2 13.8,-14.2 14.6,-14.2 15.4,-14.2 16.2,-14.2 17,-14.2 17.8,-14.2 18.6,-14.2 19.4,-14.2 20.2,-14.2 21,-14.2 21.8,-14.2 22.6,-14.2 23.4,-14.2 30.6,-14.2 31.4,-14.2 32.2,-14.2 33,-14.2 33.8,-14.2 34.6,-14.2 35.4,-14.2 36.2,-14.2 38.6,-14.2 39.4,-14.2 47.4,-14.2 49,-14.2 49.8,-14.2 50.6,-14.2 51.4,-14.2 52.2,-14.2 53,-14.2 53.8,-14.2 54.6,-14.2 55.4,-14.2 56.2,-14.2 57,-14.2 57.8,-14.2 7.8,-13.4 8.6,-13.4 9.4,-13.4 10.2,-13.4 11,-13.4 11.8,-13.4 12.6,-13.4 13.4,-13.4 14.2,-13.4 15,-13.4 15.8,-13.4 16.6,-13.4 17.4,-13.4 18.2,-13.4 19,-13.4 19.8,-13.4 20.6,-13.4 21.4,-13.4 22.2,-13.4 23,-13.4 30.2,-13.4 31,-13.4 31.8,-13.4 32.6,-13.4 33.4,-13.4 34.2,-13.4 35,-13.4 35.8,-13.4 38.2,-13.4 39,-13.4 49.4,-13.4 50.2,-13.4 51,-13.4 51.8,-13.4 52.6,-13.4 53.4,-13.4 54.2,-13.4 55,-13.4 55.8,-13.4 56.6,-13.4 57.4,-13.4 60.6,-13.4 7.4,-12.6 8.2,-12.6 9,-12.6 9.8,-12.6 10.6,-12.6 11.4,-12.6 12.2,-12.6 13,-12.6 13.8,-12.6 14.6,-12.6 15.4,-12.6 16.2,-12.6 17,-12.6 17.8,-12.6 18.6,-12.6 19.4,-12.6 20.2,-12.6 21,-12.6 21.8,-12.6 22.6,-12.6 37.8,-12.6 38.6,-12.6 39.4,-12.6 47.4,-12.6 49,-12.6 49.8,-12.6 50.6,-12.6 51.4,-12.6 52.2,-12.6 53,-12.6 53.8,-12.6 54.6,-12.6 55.4,-12.6 56.2,-12.6 57,-12.6 57.8,-12.6 36.25,-11.95 37,-11.95 35.5,-11.923 6.2,-11.8 15,-11.8 15.8,-11.8 16.6,-11.8 17.4,-11.8 18.2,-11.8 19,-11.8 19.8,-11.8 20.6,-11.8 21.4,-11.8 31,-11.8 31.8,-11.8 32.6,-11.8 33.4,-11.8 34.2,-11.8 38.2,-11.8 39,-11.8 49.4,-11.8 50.2,-11.8 51,-11.8 51.8,-11.8 52.6,-11.8 53.4,-11.8 54.2,-11.8 55,-11.8 55.8,-11.8 56.6,-11.8 57.4,-11.8 60.6,-11.8 30.2,-11.6 5.8,-11 15.4,-11 16.2,-11 17,-11 17.8,-11 18.6,-11 19.4,-11 20.2,-11 21,-11 31.4,-11 32.2,-11 33,-11 33.8,-11 34.6,-11 37.8,-11 38.6,-11 39.4,-11 47.4,-11 49,-11 49.8,-11 50.6,-11 51.4,-11 52.2,-11 53,-11 53.8,-11 54.6,-11 55.4,-11 56.2,-11 27.9,-10.8 28.6,-10.8 29.3,-10.8 23.75,-10.7 24.45,-10.7 25.15,-10.7 23.05,-10.35 4.6,-10.2 5.4,-10.2 15,-10.2 15.8,-10.2 16.6,-10.2 17.4,-10.2 18.2,-10.2 19,-10.2 19.8,-10.2 34.2,-10.2 35,-10.2 39,-10.2 49.4,-10.2 50.2,-10.2 51,-10.2 51.8,-10.2 52.6,-10.2 53.4,-10.2 54.2,-10.2 55,-10.2 55.8,-10.2 60.6,-10.2 10.541,-10.025 27.15,-9.9 23,-9.65 5,-9.4 5.8,-9.4 15.4,-9.4 16.2,-9.4 17,-9.4 17.8,-9.4 18.6,-9.4 19.4,-9.4 32.2,-9.4 38.6,-9.4 39.4,-9.4 40.2,-9.4 41,-9.4 41.8,-9.4 42.6,-9.4 43.4,-9.4 44.2,-9.4 45,-9.4 49.8,-9.4 50.6,-9.4 51.4,-9.4 54.6,-9.4 55.4,-9.4 56.2,-9.4 4.6,-8.6 5.4,-8.6 6.2,-8.6 15,-8.6 15.8,-8.6 16.6,-8.6 17.4,-8.6 18.2,-8.6 19,-8.6 39,-8.6 43,-8.6 43.8,-8.6 46.2,-8.6 47,-8.6 50.2,-8.6 51,-8.6 54.2,-8.6 55,-8.6 55.8,-8.6 60.6,-8.6 5,-7.8 5.8,-7.8 6.6,-7.8 7.4,-7.8 8.2,-7.8 9,-7.8 9.8,-7.8 10.6,-7.8 11.4,-7.8 12.2,-7.8 13,-7.8 13.8,-7.8 14.6,-7.8 15.4,-7.8 16.2,-7.8 17,-7.8 17.8,-7.8 18.6,-7.8 40.07,-7.8 41,-7.8 45.8,-7.8 46.6,-7.8 49.8,-7.8 50.6,-7.8 51.4,-7.8 54.6,-7.8 55.4,-7.8 26.55,-7.475 4.6,-7 5.4,-7 6.2,-7 7,-7 9.4,-7 10.2,-7 11,-7 11.8,-7 12.6,-7 13.4,-7 14.2,-7 15,-7 15.8,-7 16.6,-7 17.4,-7 18.2,-7 19,-7 43,-7 43.8,-7 44.6,-7 45.4,-7 46.2,-7 47,-7 47.8,-7 48.6,-7 49.4,-7 50.2,-7 51,-7 51.8,-7 52.6,-7 53.4,-7 54.2,-7 55,-7 55.8,-7 59.8,-7 60.6,-7 9.8,-6.2 10.6,-6.2 11.4,-6.2 12.2,-6.2 13,-6.2 13.8,-6.2 14.6,-6.2 15.4,-6.2 16.2,-6.2 17,-6.2 17.8,-6.2 18.6,-6.2 19.4,-6.2 41,-6.2 43.4,-6.2 47.4,-6.2 50.6,-6.2 51.4,-6.2 52.2,-6.2 53,-6.2 53.8,-6.2 54.6,-6.2 55.4,-6.2 56.2,-6.2 57,-6.2 57.8,-6.2 58.6,-6.2 59.4,-6.2 60.2,-6.2 26.55,-5.95 10.2,-5.4 11,-5.4 11.8,-5.4 12.6,-5.4 13.4,-5.4 14.2,-5.4 15,-5.4 15.8,-5.4 16.6,-5.4 17.4,-5.4 18.2,-5.4 19,-5.4 37.4,-5.4 55,-5.4 55.8,-5.4 56.6,-5.4 57.4,-5.4 58.2,-5.4 59,-5.4 59.8,-5.4 60.6,-5.4 5,-4.6 5.8,-4.6 6.6,-4.6 9.8,-4.6 10.6,-4.6 11.4,-4.6 12.2,-4.6 13,-4.6 13.8,-4.6 14.6,-4.6 15.4,-4.6 16.2,-4.6 17,-4.6 17.8,-4.6 18.6,-4.6 19.4,-4.6 25.8,-4.6 26.6,-4.6 37,-4.6 37.8,-4.6 38.6,-4.6 50.6,-4.6 51.4,-4.6 52.2,-4.6 53,-4.6 55.4,-4.6 56.2,-4.6 57,-4.6 57.8,-4.6 58.6,-4.6 59.4,-4.6 60.2,-4.6 1.4,-3.8 3.8,-3.8 4.6,-3.8 5.4,-3.8 6.2,-3.8 7,-3.8 7.8,-3.8 8.6,-3.8 9.4,-3.8 10.2,-3.8 11,-3.8 11.8,-3.8 12.6,-3.8 13.4,-3.8 14.2,-3.8 15,-3.8 15.8,-3.8 16.6,-3.8 17.4,-3.8 18.2,-3.8 19,-3.8 19.8,-3.8 20.6,-3.8 21.4,-3.8 22.2,-3.8 26.2,-3.8 27,-3.8 31,-3.8 31.8,-3.8 32.6,-3.8 33.4,-3.8 34.2,-3.8 35,-3.8 35.8,-3.8 36.6,-3.8 50.2,-3.8 57.4,-3.8 1,-3 4.2,-3 5,-3 5.8,-3 6.6,-3 9.8,-3 10.6,-3 11.4,-3 12.2,-3 13,-3 13.8,-3 14.6,-3 15.4,-3 16.2,-3 17,-3 17.8,-3 18.6,-3 19.4,-3 20.2,-3 21,-3 21.8,-3 25.8,-3 26.6,-3 27.4,-3 31.4,-3 32.2,-3 33,-3 33.8,-3 34.6,-3 35.4,-3 36.2,-3 49.8,-3 57.8,-3 59.4,-3 1.4,-2.2 4.6,-2.2 5.4,-2.2 6.2,-2.2 8.1,-2.2 9.4,-2.2 10.2,-2.2 11,-2.2 11.8,-2.2 12.6,-2.2 13.4,-2.2 14.2,-2.2 15,-2.2 15.8,-2.2 16.6,-2.2 17.4,-2.2 18.2,-2.2 19,-2.2 19.8,-2.2 20.6,-2.2 21.4,-2.2 22.2,-2.2 26.2,-2.2 27,-2.2 31,-2.2 31.8,-2.2 32.6,-2.2 33.4,-2.2 34.2,-2.2 35,-2.2 35.8,-2.2 36.6,-2.2 41.4,-2.2 42.2,-2.2 43,-2.2 43.8,-2.2 44.6,-2.2 45.4,-2.2 46.2,-2.2 47,-2.2 47.8,-2.2 48.6,-2.2 49.4,-2.2 54.2,-2.2 57.4,-2.2 1,-1.4 1.8,-1.4 2.6,-1.4 3.4,-1.4 4.2,-1.4 5,-1.4 5.8,-1.4 6.6,-1.4 9.8,-1.4 10.6,-1.4 11.4,-1.4 12.2,-1.4 13,-1.4 13.8,-1.4 14.6,-1.4 15.4,-1.4 16.2,-1.4 17,-1.4 17.8,-1.4 18.6,-1.4 19.4,-1.4 20.2,-1.4 21,-1.4 21.8,-1.4 25.8,-1.4 26.6,-1.4 27.4,-1.4 30.6,-1.4 31.4,-1.4 32.2,-1.4 33,-1.4 33.8,-1.4 34.6,-1.4 35.4,-1.4 36.2,-1.4 37,-1.4 41,-1.4 41.8,-1.4 42.6,-1.4 43.4,-1.4 44.2,-1.4 45,-1.4 45.8,-1.4 46.6,-1.4 47.4,-1.4 48.2,-1.4 49,-1.4 49.8,-1.4 53.8,-1.4 54.6,-1.4 55.4,-1.4 56.2,-1.4 57,-1.4 57.8,-1.4 58.6,-1.4 59.4,-1.4 60.2,-1.4 1.4,-0.6 2.2,-0.6 3,-0.6 3.8,-0.6 4.6,-0.6 5.4,-0.6 6.2,-0.6 7,-0.6 7.8,-0.6 8.6,-0.6 9.4,-0.6 10.2,-0.6 11,-0.6 11.8,-0.6 12.6,-0.6 13.4,-0.6 14.2,-0.6 15,-0.6 15.8,-0.6 16.6,-0.6 17.4,-0.6 18.2,-0.6 19,-0.6 19.8,-0.6 20.6,-0.6 21.4,-0.6 22.2,-0.6 23,-0.6 23.8,-0.6 24.6,-0.6 25.4,-0.6 26.2,-0.6 27,-0.6 27.8,-0.6 28.6,-0.6 29.4,-0.6 30.2,-0.6 31,-0.6 31.8,-0.6 32.6,-0.6 33.4,-0.6 34.2,-0.6 35,-0.6 35.8,-0.6 36.6,-0.6 37.4,-0.6 38.2,-0.6 39,-0.6 39.8,-0.6 40.6,-0.6 41.4,-0.6 42.2,-0.6 43,-0.6 43.8,-0.6 44.6,-0.6 45.4,-0.6 46.2,-0.6 47,-0.6 47.8,-0.6 48.6,-0.6 49.4,-0.6 50.2,-0.6 51,-0.6 51.8,-0.6 52.6,-0.6 53.4,-0.6 54.2,-0.6 55,-0.6 55.8,-0.6 56.6,-0.6 57.4,-0.6 58.2,-0.6 59,-0.6 59.8,-0.6 60.6,-0.6
  other v2: 26.543,-24.02 25.443,-22.92 26.543,-22.92 27.643,-22.92 26.543,-21.82
  other v3: 40.65,-20.46 22.35,-9.65
LED1: IC1.9 R22.1 | length 2.4
  Top Layer w0.254: R22.1 40.5,-14.275 41.05,-14.825 IC1.9@41.05,-16.475
LED2: IC1.8 R23.1 | length 1.3
  Top Layer w0.254: R23.1 41.8,-14.288 42.075,-14.563 IC1.8@42.075,-15.45
LED3: IC1.7 R24.1 | length 1.3
  Top Layer w0.254: IC1.7@42.725,-15.45 42.725,-14.663 43.1,-14.288 R24.1
LED4: IC1.6 R25.1 | length 1.8
  Top Layer w0.254: IC1.6@43.375,-15.45 43.389,-15.436 43.389,-14.909 43.875,-14.423 44.242,-14.423 R25.1
LED5: IC1.5 R26.1 | length 2.2
  Top Layer w0.254: IC1.5@44.025,-15.45 44.525,-15.45 45.7,-14.275 R26.1
NetC1_2: C1.2 U1.20 | length 3.1
  Top Layer w0.254: C1.2 21.879,-21.379 22.67,-22.17 U1.20
NetC2_1: C2.1 U1.19 | length 1.5
  Top Layer w0.254: C2.1 23.258,-21.396 24.2,-21.396 24.474,-21.67 U1.19
NetC2_2: C2.2 L1.1 U1.18 | length 2.5
  Top Layer w0.254: C2.2 23.276,-19.889 24.394,-21.007 U1.18
NetC14_2: C14.2 U1.23 | length 1.5
  Top Layer w0.254: C14.2@23.114,-23.699 23.136,-23.677 24.623,-23.677 U1.23
NetC31_1: C31.1 U2.3 | length 1
  Top Layer w0.254: C31.1 34.063,-35.657 35.018,-35.657 U2.3
NetC40_1: C40.1 U3.3 | length 2.3
  Top Layer w0.254: U3.3 26.799,-10.65 26.799,-11.165 27.233,-11.6 C40.1
NetD1_A: D1.A R22.2 | length 1.1
  Top Layer w0.254: R22.2 D1.A
NetD2_A: D2.A R23.2 | length 1.1
  Top Layer w0.254: R23.2 D2.A
NetD3_A: D3.A R24.2 | length 1.1
  Top Layer w0.254: R24.2 D3.A
NetD4_A: D4.A R25.2 | length 1.1
  Top Layer w0.254: R25.2 D4.A
NetD5_A: D5.A R26.2 | length 1.1
  Top Layer w0.254: R26.2 D5.A
NetL2_1: L2.1 U2.11
  other v1: 38.2,-34.65 38.2,-33.95 41.2,-33.9 40.6,-33.55 41.2,-33.15
NetL2_2: L2.2 U2.9
  other v1: 41.2,-37.6 40.55,-37.2 41.2,-36.85 38.25,-36.8 38.25,-36.1
NetL3_1: L3.1 U3.11
  other v1: 24.775,-7.85 25.475,-7.85 23.3,-4.9 24,-4.9 24.7,-4.9
NetL3_2: L3.2 U3.9
  other v1: 27.625,-7.85 28.325,-7.85 28.4,-4.9 29.1,-4.9 29.8,-4.9
NetQ1_G: Q1.G U1.10 | length 7.9
  Top Layer w0.254: U1.10 29.606,-22.67 29.811,-22.875 v1(30.625,-22.875) ; v1(35.2,-21.55) Q1.G
  Bottom Layer w0.254: v1(30.625,-22.875) 33.44,-22.875 33.471,-22.844 33.906,-22.844 v1(35.2,-21.55)
NetR1_2: R1.2 R3.1 U1.1 | length 3.6
  Top Layer w0.254: R3.1 24.956,-28.158 24.956,-26.92 R1.2 25.019,-26.729 25.293,-26.455 U1.1
NetR2_2: R2.2 U1.15 | length 1.9
  Top Layer w0.254: U1.15 26.793,-19.656 27.084,-19.365 R2.2
NetR4_1: R4.1 U1.5 | length 2.9
  Top Layer w0.254: U1.5 27.293,-27.512 27.381,-27.6 R4.1@27.381,-27.728
NetR5_1: R5.1 U1.4 | length 4.6
  Top Layer w0.254: U1.4 26.793,-28.79 27.145,-29.142 R5.1
NetR6_1: R6.1 U1.3 | length 9.3
  Top Layer w0.254: U1.3 26.289,-24.837 26.289,-29.838 26.924,-30.473 26.924,-32.891 26.322,-33.493 R6.1
NetR7_1: R7.1 U1.2 | length 6.2
  Top Layer w0.254: U1.2 25.793,-30.457 26.129,-30.793 R7.1
NetR8_1: R8.1 U1.24 | length 4.7
  Top Layer w0.254: R8.1 23.59,-28.221 24.257,-27.554 24.257,-24.543 24.467,-24.333 24.467,-24.177 24.474,-24.17 U1.24
NetR14_2: R14.2 R15.1 U2.5 | length 7
  Top Layer w0.254: U2.5 35.45,-39.008 35.2,-39.258 35.2,-41.3 35.449,-41.549 36.149,-41.549 R14.2
  Top Layer w0.762: R15.1 R14.2
NetR18_2: R18.2 R19.1 U3.5 | length 10
  Top Layer w0.254: U3.5 32.682,-10.218 33.4,-9.5 37.639,-9.5 R18.2
SENS_1: IC1.2 J16.GND R20.2 | length 28.8
  Top Layer w0.254: IC1.2 45.148,-17.798 45.748,-17.798 46.677,-18.727 46.677,-20.651 v1(46.728,-20.702) ; v1(46.75,-25.2) 46.75,-39.725 48.87,-41.845 R20.2
  Top Layer w0.762: R20.2 48.885,-42.115 48.885,-44.635 J16.GND
  Bottom Layer w0.254: v1(46.728,-20.702) 46.728,-25.178 v1(46.75,-25.2)
SENS_2: IC1.4 J18.GND R27.2 | length 15.4
  Top Layer w0.254: R27.2 41.98,-7.75 44.5,-7.75 46.65,-9.9 46.65,-15.125 45.373,-16.402 45.325,-16.45 IC1.4
  Top Layer w0.762: J18.GND 41.915,-5.365 41.915,-7.785 R27.2
TS: R9.2 R10.1 R11.1 U1.9 | length 7.1
  Top Layer w0.254: U1.9 28.463,-23.177 28.83,-23.177 29.351,-23.699 31.261,-23.699 R10.1 30.585,-24.375 30.606,-24.396 v1(30.606,-24.468)
  Bottom Layer w0.254: v1(30.606,-24.468) 33.473,-24.468 R11.1
Vbat: C19.1 C20.1 C21.1 C22.1 D9.C J13.1 J14.1 J15.1 Q1.S R16.1 U1.11 U1.12 | length 5.9
  Top Layer w0.254: v1(36.221,-17.819) 36.231,-17.81 37.145,-17.81 R16.1
  Bottom Layer w0.254: v1(33.8,-21.75) 36.221,-19.329 v1(36.221,-17.819)
Vin: C3.1 C4.1 C5.1 C44.P C45.P C46.1 C47.P D6.C J1.2 J3.2 J5.2 J8.2 J11.2 R1.1 U1.21 | length 10.3
  Top Layer w0.254: v1(21.999,-26.25) 22.606,-26.857 R1.1
  Top Layer w0.508: J5.2 2.857,-5.484 7.784,-5.484 D6.C
  Bottom Layer w0.254: v1(19.85,-24.15) 19.899,-24.15 v1(21.999,-26.25)
Vsys: C6.1 C7.1 C8.1 C9.1 C10.1 C11.1 C12.1 C13.1 C23.1 C24.1 C25.1 C32.1 C33.1 C34.1 C41.1 C42.1 D7.C IC1.16 J2.1 J4.1 J6.1 J9.1 J12.1 L1.2 Q1.D R12.1 R13.1 R17.1 R28.1 U1.13 U1.14 U2.12 U2.13 U3.12 U3.13 | length 28
  Top Layer w0.254: C42.1 44.045,-21.47 44.05,-21.475 ; C42.1@44.075,-20.55 IC1.16
  Top Layer w0.762: 21.1,-8.8 21.1,-9.6 23.3,-11.8 25.1,-11.8 28.343,-15.043 L1.2 ; C23.1 38.449,-29.861 38.449,-29.346 38.895,-28.9 42.5,-28.9 45.8,-25.6 45.8,-24 ; D7.C J6.1
Vusb: C16.1 C17.1 C18.1 D8.C J7.VBUS R6.2 U1.22 | length 6.1
  Top Layer w0.254: C16.1 20.75,-34.642 21.858,-35.75 23.65,-35.75 24.732,-34.668 R6.2
pads on no net: IC1.14 IC1.15 IC1.TH J4.2 J7. J7.D_N J7.D_P J7.ID J16.D_N J16.D_P J16.S J18.D_N J18.D_P J18.S U1.7 U2.2 U3.2

## Polygon pours and split planes (outlines as drawn)
GND on Top Layer "Top Layer-No Net1" (solid, pour order 64): 0,-50 0,0 61,0 61,-50
Vsys on Top Layer "VSYS_L01_P061" (solid, pour order 61): 36.692,-19.95 37.15,-19.95 38.4,-21.2 56.45,-21.2 58.15,-22.9 58.15,-24.55 36.706,-24.55
Vbat on Top Layer "VBAT_L01_P025" (solid, pour order 25): 28.132,-21.449 28.132,-22.4 31.14,-22.404 31.891,-23.156 31.9,-28.9 15.4,-45.4 15.4,-47.2 33.4,-47.2 33.6,-47 33.6,-22.25 32.802,-21.452
NetC2_2 on Top Layer "NETC2_2_L01_P021" (solid, pour order 21): 25.551,-21.319 25.527,-21.295 25.527,-19.872 25.273,-19.872 25.019,-19.618 25.019,-18.475 25.654,-17.84 25.654,-13.268 23.876,-13.268 23.876,-20.489 24.706,-21.319
Vin on Top Layer "VIN_L01_P020" (solid, pour order 20): 1.397,-4.318 1.397,-37.846 3.937,-37.846 3.937,-34.544 11.131,-27.35 18.15,-27.35 21.921,-23.579 24.892,-23.579 24.892,-22.168 15.818,-22.168 3.937,-10.287 3.937,-4.318
no net on Top Layer "NONET_L01_P023" (solid, pour order 23): 28.848,-22.42 31.155,-22.42 31.985,-23.25
Vsys on Top Layer "VSYS_L01_P063" (solid, pour order 63): 56.611,-38.761 56.611,-40.339 59.461,-40.339 60.1,-39.7 60.1,-8.1 59.073,-7.073 56.742,-7.073 56.742,-8.827 56.769,-8.8 58.5,-8.8 58.5,-14.531 58.058,-14.973 56.742,-14.973 56.742,-16.727 58.058,-16.727 58.058,-16.758 58.5,-17.2 58.5,-21.2 56.4,-21.2 56.4,-24.55 58.15,-24.55 58.5,-24.9 58.5,-30.55 58.189,-30.861 56.611,-30.861 56.611,-32.439 58.189,-32.439 58.189,-32.489 58.5,-32.8 58.5,-38.45 58.189,-38.761
Vsys on Top Layer "VSYS_L01_P060" (solid, pour order 60): 36.2,-34.3 36.2,-32.576 36.426,-32.35 37.6,-31.176 37.6,-29.35 39.1,-29.35 39.1,-31.5 39.1,-31.9 39.8,-32.499 39.8,-33.5 38.799,-33.5 38.688,-33.389 38.688,-33.045 37.73,-33.045 37.275,-33.5 37.275,-34.3
Vusb on Top Layer "VUSB_L01_P017" (solid, pour order 17): 24.892,-23 21.55,-23 20.4,-24.15 20.4,-32.051 20.066,-32.385 20.066,-34.544 20.574,-34.544 20.574,-33.147 21.55,-32.171 21.55,-24 22.2,-23.35 24.892,-23.35
Vsys on Top Layer "VSYS_L01_P059" (solid, pour order 59): 28.067,-21.396 31.8,-21.4 32.15,-21.05 35.95,-21.05 36.25,-21.35 36.25,-21.85 36.2,-21.9 35.4,-21.9 35.25,-22.05 35.25,-23.7 36.2,-24.65 37.15,-24.65 37.15,-19.55 29.25,-19.55 28.1,-20.7
5V_2 on Top Layer "Bottom Layer-5V_2" (solid, pour order 58): 36.2,-36.3 37,-36.3 38.3,-37.6 40,-37.6 40,-42.4 42.8,-42.4 42.8,-44.877 42.138,-45.539 42.1,-45.5 40.2,-45.5 36.9,-42.2 36.9,-38 36.2,-37.3
NetL2_1 on Top Layer "Top Layer-NetL2_1" (solid, pour order 46): 44.4,-32 44.4,-33.9 44.05,-34.25 40.35,-34.25 40.35,-33.15 41.5,-32
NetL2_2 on Top Layer "Top Layer-NetL2_2" (solid, pour order 48): 44.4,-38.7 44.4,-36.75 44.15,-36.5 40.25,-36.5 40.25,-37.45 41.5,-38.7
NetL2_1 on Top Layer "Top Layer-NetL2_1 1" (solid, pour order 50): 36.2,-35.05 38.4,-35.05 38.65,-34.8 38.65,-33.6 38,-33.6 37.8,-33.8 37.8,-34.3 37.4,-34.7 36.2,-34.7
NetL2_2 on Top Layer "Top Layer-NetL2_2 1" (solid, pour order 52): 36.2,-35.75 38.4,-35.75 38.65,-36 38.65,-37.3 38,-37.3 37.75,-37.05 37.75,-36.45 37.4,-36.1 36.2,-36.1
NetL3_1 on Top Layer "Top Layer-NetL3_1" (solid, pour order 38): 25,-1.7 22.8,-1.7 22.8,-5 23.1,-5.3 25,-5.3
NetL3_2 on Top Layer "Top Layer-NetL3_2 1" (solid, pour order 36): 28,-1.7 30.2,-1.7 30.2,-5.2 30.1,-5.3 28.1,-5.3 28,-5.2
Vsys on Top Layer "Top Layer-No Net 1" (solid, pour order 28): 25.5,-9.4 25.5,-8.4 24.6,-8.4 24.2,-8 24.2,-6.3 20.2,-6.3 19.8,-6.7 19.8,-8.5 20.5,-9.2 24.4,-9.2 24.6,-9.4
5V_1 on Top Layer "Top Layer-5V_1" (solid, pour order 32): 27.5,-9.475 31.225,-9.475 32.3,-8.4 38.3,-8.4 38.3,-7.5 41.472,-4.328 47.081,-4.281 47.833,-5.034 47.825,-5.95 48.2,-6.325 49.575,-6.325 49.9,-6 49.9,-4.5 48.6,-3.2 40.7,-3.2 37.815,-6.085 28.431,-6.085 28.2,-6.316 28.2,-7.1 28.4,-7.3 28.7,-7.3 28.9,-7.5 28.9,-8.2 28.6,-8.5 27.5,-8.5
NetL3_1 on Top Layer "Top Layer-No Net" (solid, pour order 27): 26.225,-9.45 25.85,-9.45 25.85,-8.55 25.525,-8.225 24.425,-8.225 24.425,-7.5 25.85,-7.5 26.225,-7.875
NetL3_2 on Top Layer "Top Layer-NetL3_2" (solid, pour order 26): 26.875,-9.45 27.275,-9.45 27.275,-8.6 27.635,-8.24 28.65,-8.24 28.65,-7.5 27.25,-7.5 26.875,-7.875
Vusb on Top Layer "VUSB_L01_P024" (solid, pour order 24): 20.4,-33.5 11.3,-42.6 7.4,-42.6 6.618,-43.382 5,-43.4 5,-43.9 12.4,-43.9 21.55,-34.75 21.55,-31.95 20.4,-31.95
Vsys on Top Layer "VSYS_L01_P022" (solid, pour order 22): 27.043,-21.399 27.046,-21.396 28.067,-21.396 29.464,-19.999 29.464,-13.141 27.452,-13.141 27.432,-13.161 27.432,-18.221 27.813,-18.602 27.813,-19.618 27.051,-20.38
no net on Top Layer "NONET_L01_P019" (solid, pour order 19): 1.651,-4.318
no net on Top Layer "NONET_L01_P018" (solid, pour order 18): 1.651,-4.318
GND on Bottom Layer "GND_BOTTPM" (solid, pour order 56): 0,-50 0,0 61,0 61,-50
NetL2_1 on Bottom Layer "Bottom Layer-NetL2_1" (solid, pour order 44): 41.55,-32.75 41.55,-34.1 40.7,-34.95 37.85,-34.95 37.85,-33.8 38.9,-32.75
NetL2_2 on Bottom Layer "Bottom Layer-NetL2_2" (solid, pour order 42): 41.6,-38 41.6,-36.65 40.7,-35.75 37.9,-35.75 37.9,-36.9 39,-38
NetL3_2 on Bottom Layer "Bottom Layer-NetL3_2" (solid, pour order 54): 28.076,-4.576 30.1,-4.576 30.1,-6 29.775,-6.4 28.649,-7.526 28.649,-8.174 27.301,-8.174 27.301,-5.351
NetL3_1 on Bottom Layer "Bottom Layer-NetL3_1" (solid, pour order 40): 25.9,-8.3 25.9,-5.5 25,-4.6 23,-4.6 23,-5.8 24.4,-7.2 24.4,-8.3

## Silkscreen, mask and mechanical layers (free items; w line width, h text height)
Mechanical 1:
  the board outline again, w0.254

## Text inside footprints (layer, text, board x,y; h text height)
U2: Mechanical 19 "Designator" at 34.918,-35.444 h0.4
U3: Mechanical 19 "Designator" at 26.6,-10.75 h0.4 r90